# EAGLE board FET_ctrl[Conflict] (EAGLE 7.3.0)
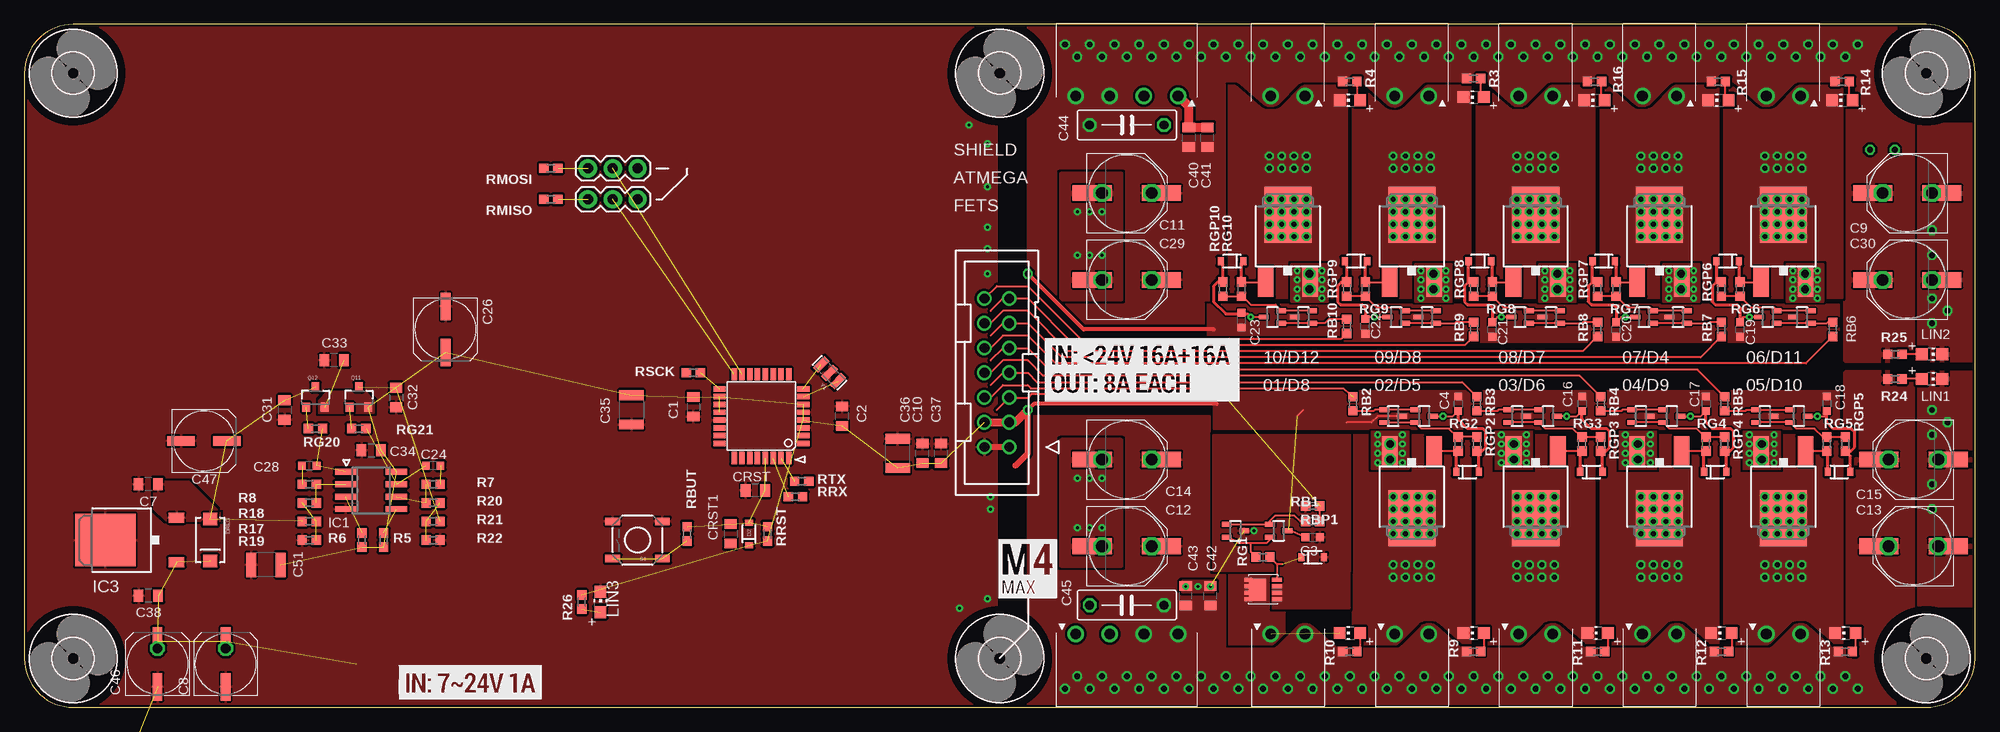
[diagram p0: board, top side]
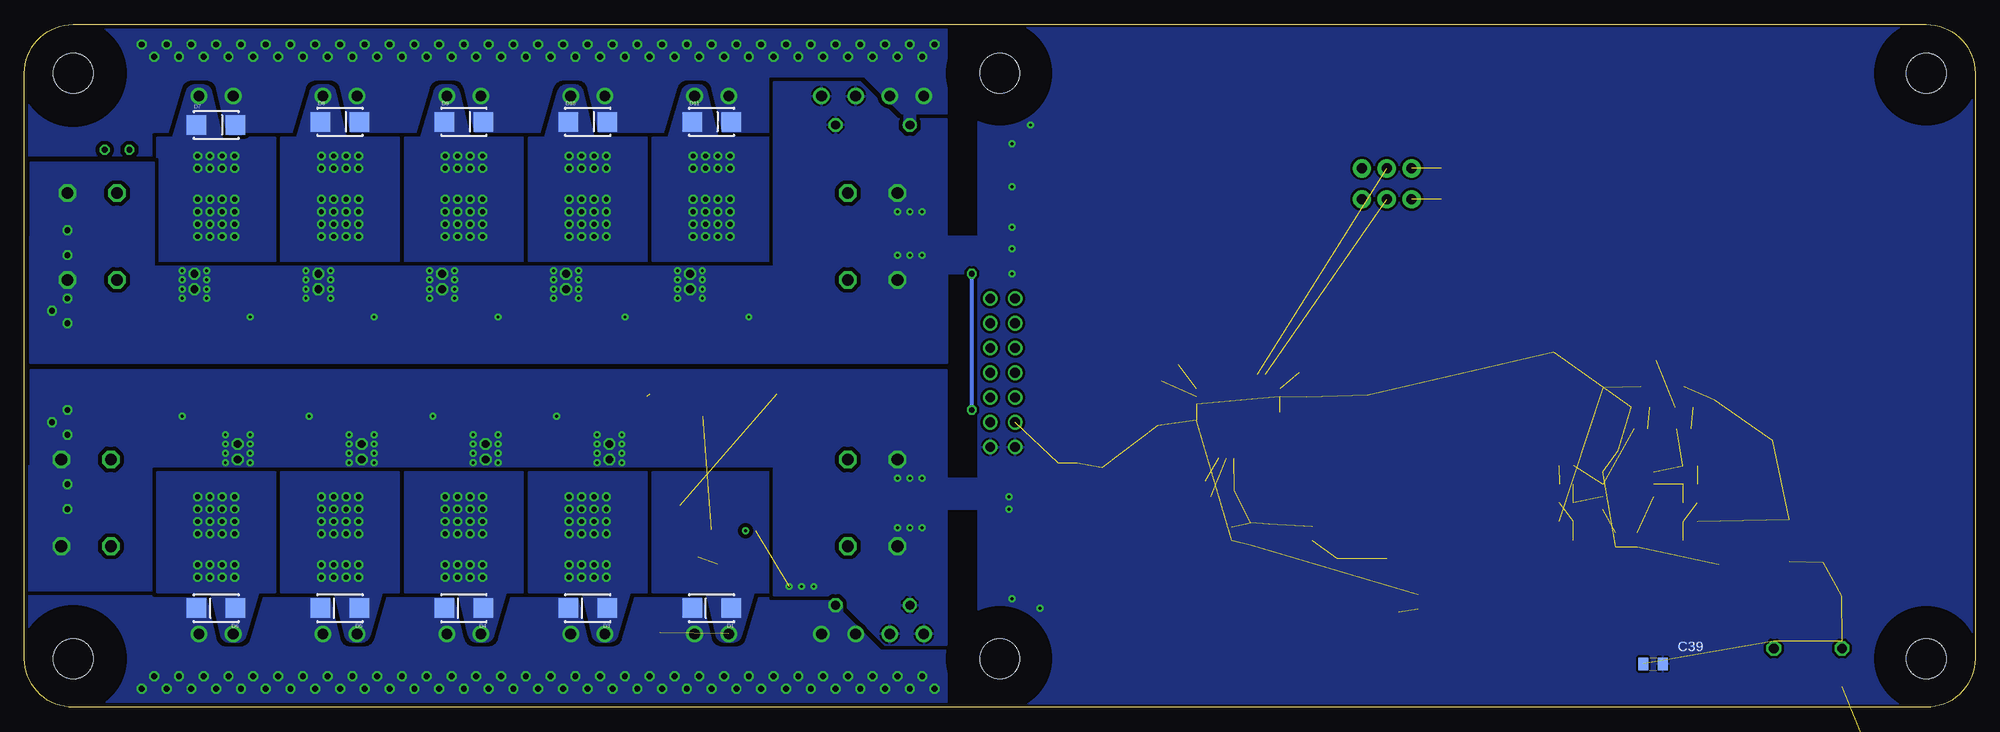
[diagram p1: board, bottom side, seen from below]

Size 200 x 70 mm. Coordinates in mm from the lower left corner, seen from the top.
Outline: 0,65 0,5 arc90 5,0 195,0 arc90 200,5 200,65 arc90 195,70 5,70 arc90 0,65
Copper layers (1*16): Top 0.035mm / dielectric 1.5mm / Bottom 0.035mm
Design rules "default": minimum track width 6mil, minimum drill 0.3mm, track to track 7mil, track to pad 7mil, pad to pad 7mil, via to via 7mil, smd to smd 6mil, copper to edge 10mil, drill to drill 10mil, minimum pad ring 10mil, minimum via ring 8mil, stop-mask expansion 3mil, vias tented up to drill 0.3mm, thermal gap 8mil

## Footprints (pad centres in the part's own frame; a part is rotated, then mirrored left to right if it is on the bottom)
C0805 = smd 1 x 1.25: 1 -1,0; 2 1,0
C0603 = smd 0.8 x 0.8: 1 -0.75,0; 2 0.75,0
UD-6,3X5,8_NICHICON = smd 2.8 x 1: + 2.35,0; - -2.35,0
PANASONIC_F = smd 4 x 1.6: + 3.55,0; - -3.55,0
C1210 = smd 1 x 2.5: 1 -1.5,0; 2 1.5,0
C075-032X103 = drill 0.914 octagon: 1 -3.81,0; 2 3.81,0
SMA-DIODE_ALT = smd 2 x 2: A -2,0; C 2,0
SOD-323 = smd 0.63 x 0.83: 1 -1.15,0; 2 1.15,0
SMA-DIODE = smd 1.27 x 1.47: A -2.15,0; C 2.15,0
4,1 = hole 4.1: 0,0
SO08 = smd 0.6 x 2.2: 1 -1.905,-2.6; 2 -0.635,-2.6; 3 0.635,-2.6; 4 1.905,-2.6; 5 1.905,2.6; 6 0.635,2.6; 7 -0.635,2.6; 8 -1.905,2.6
TO252 = smd 1 x 1.6: 1 -2.28,-4.8; 2 2.28,-4.8 | smd 5.4 x 6.2: 3 0,2.5
1X03 = drill 1.016 pad 1.88: 1 0,0; 2 2.54,0; 3 5.08,0
CHIP-LED0805 = smd 1.2 x 1.2: A 0,-1.05; C 0,1.05
POWERPAK1212-8 = smd 0.762 x 0.406: D1 1.549,0.991; D2 1.549,0.33; D3 1.549,-0.33; D4 1.549,-0.991 | smd 1.727 x 2.235: DPAD 0.584,0 | smd 0.991 x 0.406: G -1.422,-0.991; S1 -1.422,0.991; S2 -1.422,0.33; S3 -1.422,-0.33
DPAK = smd 1.6 x 3: 1 -2.28,-5.31; 3 2.28,-5.31 | smd 4.826 x 5.715: 4 0,1.588
SOT23-3 = smd 0.8 x 0.9: 1 -0.95,-1; 2 0.95,-1; 3 0,1.1
R0603 = smd 0.95 x 0.95: 1 -0.725,0; 2 0.725,0
TACTILE_SWITCH_SMD = smd 1.524 x 0.762: 1 -2.54,1.905; 2 2.54,1.905; 3 -2.54,-1.905; 4 2.54,-1.905
SOT323 = smd 0.5 x 1: 1 0,0.9; 2 -0.65,-0.9; 3 0.65,-0.9
TQFP32-08 = smd 1.27 x 0.559: 1 -4.293,2.8; 2 -4.293,2; 3 -4.293,1.2; 4 -4.293,0.4; 5 -4.293,-0.4; 6 -4.293,-1.2; 7 -4.293,-2; 8 -4.293,-2.8; 17 4.293,-2.8; 18 4.293,-2; 19 4.293,-1.2; 20 4.293,-0.4; 21 4.293,0.4; 22 4.293,1.2; 23 4.293,2; 24 4.293,2.8 | smd 0.559 x 1.27: 9 -2.8,-4.293; 10 -2,-4.293; 11 -1.2,-4.293; 12 -0.4,-4.293; 13 0.4,-4.293; 14 1.2,-4.293; 15 2,-4.293; 16 2.8,-4.293; 25 2.8,4.293; 26 2,4.293; 27 1.2,4.293; 28 0.4,4.293; 29 -0.4,4.293; 30 -1.2,4.293; 31 -2,4.293; 32 -2.8,4.293
TSSOP28 = smd 0.305 x 0.991: 1 -4.225,-2.918; 2 -3.575,-2.918; 3 -2.925,-2.918; 4 -2.275,-2.918; 5 -1.625,-2.918; 6 -0.975,-2.918; 7 -0.325,-2.918; 8 0.325,-2.918; 9 0.975,-2.918; 10 1.625,-2.918; 11 2.275,-2.918; 12 2.925,-2.918; 13 3.575,-2.918; 14 4.225,-2.918; 15 4.225,2.918; 16 3.575,2.918; 17 2.925,2.918; 18 2.275,2.918; 19 1.625,2.918; 20 0.975,2.918; 21 0.325,2.918; 22 -0.325,2.918; 23 -0.975,2.918; 24 -1.625,2.918; 25 -2.275,2.918; 26 -2.925,2.918; 27 -3.575,2.918; 28 -4.225,2.918
1751248 = drill 1.1 pad 1.7: 1 -1.75,-0.1; 2 1.75,-0.1
1751264 = drill 1.1 pad 1.7: 1 -5.25,-0.1; 2 -1.75,-0.1; 3 1.75,-0.1; 4 5.25,-0.1
PAK100/2500-14 = drill 1 pad 1.422: 1 -7.62,-1.27; 2 -7.62,1.27; 3 -5.08,-1.27; 4 -5.08,1.27; 5 -2.54,-1.27; 6 -2.54,1.27; 7 0,-1.27; 8 0,1.27; 9 2.54,-1.27; 10 2.54,1.27; 11 5.08,-1.27; 12 5.08,1.27; 13 7.62,-1.27; 14 7.62,1.27
RESONATOR-SMD = smd 0.7 x 1.7: 1 -1.2,0; 2 0,0; 3 1.2,0

## Placement (x,y rotation side)
C1  [C0805]  68.58,30.8 270 top
C2  [C0805]  83.82,29.84 90 top
C3  [C0603]  132.08,17.42 0 top
C4  [C0603]  147,31.11 270 top
C7  [C0805]  12.7,22.86 180 top
C8  [UD-6,3X5,8_NICHICON]  20.64,4.45 90 top
C9  [PANASONIC_F]  193.04,52.7 180 top
C10  [C0805]  92.08,26.04 90 top
C11  [PANASONIC_F]  113.03,52.7 0 top
C12  [PANASONIC_F]  113.03,16.51 0 top
C13  [PANASONIC_F]  193.68,16.51 180 top
C14  [PANASONIC_F]  113.03,25.4 0 top
C15  [PANASONIC_F]  193.68,25.4 180 top
C16  [C0603]  159.7,31.11 270 top
C17  [C0603]  172.4,31.11 270 top
C18  [C0603]  184.78,31.11 270 top
C19  [C0603]  175.9,38.73 90 top
C20  [C0603]  163.19,38.73 90 top
C21  [C0603]  150.5,38.73 90 top
C22  [C0603]  137.48,39.05 90 top
C23  [C0603]  124.78,39.69 90 top
C24  3.3nF  [C0603]  41.91,24.77 180 top
C26  [UD-6,3X5,8_NICHICON]  43.18,38.73 270 top
C28  3.3nF  [C0603]  29.21,24.77 0 top
C29  [PANASONIC_F]  113.03,43.81 0 top
C30  [PANASONIC_F]  193.04,43.81 180 top
C31  [C0805]  26.67,30.48 270 top
C32  [C0805]  38.1,31.75 270 top
C33  [C0805]  31.75,35.56 180 top
C34  [C0805]  35.56,26.35 0 top
C35  [C1210]  62.23,30.48 270 top
C36  [C1210]  89.53,26.04 90 top
C37  [C0805]  93.98,26.04 90 top
C38  [C0805]  12.7,11.43 180 top
C39  [C0805]  33.02,4.45 0 bottom
C40  [C0805]  119.38,58.42 90 top
C41  [C0805]  121.28,58.42 90 top
C42  [C0805]  121.6,11.43 90 top
C43  [C0805]  119.06,11.43 90 top
C44  [C075-032X103]  113.03,59.69 0 top
C45  [C075-032X103]  113.03,10.48 180 top
C46  [UD-6,3X5,8_NICHICON]  13.65,4.45 90 top
C47  [UD-6,3X5,8_NICHICON]  18.41,27.3 0 top
C51  [C1210]  24.77,14.61 180 top
CRST  [C0805]  74.93,22.23 180 top
CRST1  [C0805]  72.39,17.78 270 top
D1  [SMA-DIODE_ALT]  129.54,10.16 180 bottom
D2  [SOD-323]  74.3,17.78 90 top
D3  [SMA-DIODE_ALT]  142.24,10.16 180 bottom
D4  [SMA-DIODE_ALT]  154.94,10.16 180 bottom
D5  [SMA-DIODE_ALT]  167.64,10.16 180 bottom
D6  [SMA-DIODE_ALT]  180.34,10.16 180 bottom
D7  [SMA-DIODE_ALT]  180.34,59.69 0 bottom
D8  [SMA-DIODE_ALT]  167.64,60.01 0 bottom
D9  [SMA-DIODE_ALT]  154.94,60.01 0 bottom
D10  [SMA-DIODE_ALT]  142.24,60.01 0 bottom
D11  [SMA-DIODE_ALT]  129.54,60.01 0 bottom
DREG  [SMA-DIODE]  19.05,17.14 270 top
H1  MOUNT-HOLE4.1  [4,1]  100,5 0 top
H2  MOUNT-HOLE4.1  [4,1]  100,65 0 top
H9  MOUNT-HOLE4.1  [4,1]  195,5 0 top
H10  MOUNT-HOLE4.1  [4,1]  5,5 0 top
H11  MOUNT-HOLE4.1  [4,1]  5,65 0 top
H12  MOUNT-HOLE4.1  [4,1]  195,65 0 top
IC1  LM358D  [SO08]  35.56,22.23 270 top
IC3  7805  [TO252]  10.79,17.14 90 top
JPMISO  JUMPER-3PTH  [1X03]  57.78,52.07 0 top
JPMOSI  JUMPER-3PTH  [1X03]  57.78,55.24 0 top
LIN1  [CHIP-LED0805]  195.58,33.66 270 top
LIN2  [CHIP-LED0805]  195.58,36.2 270 top
LIN3  [CHIP-LED0805]  59.05,10.79 0 top
Q1  [POWERPAK1212-8]  127,12.06 180 top
Q2  IRLR2905  [DPAK]  142.24,20.95 180 top
Q3  IRLR2905  [DPAK]  154.94,20.95 180 top
Q4  IRLR2905  [DPAK]  167.64,20.95 180 top
Q5  IRLR2905  [DPAK]  180.34,20.95 180 top
Q6  IRLR2905  [DPAK]  180.34,48.9 0 top
Q7  IRLR2905  [DPAK]  167.64,48.9 0 top
Q8  IRLR2905  [DPAK]  154.94,48.9 0 top
Q9  IRLR2905  [DPAK]  142.24,48.9 0 top
Q10  IRLR2905  [DPAK]  129.54,48.9 0 top
Q11  P_FET  [SOT23-3]  34.29,31.75 0 top
Q12  P_FET  [SOT23-3]  29.84,31.75 0 top
R3  [R0603]  148.59,64.45 180 top
R4  [R0603]  135.89,64.14 180 top
R5  47k  [R0603]  36.83,17.14 270 top
R6  47k  [R0603]  34.61,17.14 270 top
R7  10k  [R0603]  41.91,22.86 0 top
R8  10K  [R0603]  29.21,22.86 180 top
R9  [R0603]  148.59,5.71 180 top
R10  [R0603]  135.89,5.71 180 top
R11  [R0603]  161.29,5.71 180 top
R12  [R0603]  173.99,5.71 180 top
R13  [R0603]  186.69,5.71 180 top
R14  [R0603]  186.37,64.14 180 top
R15  [R0603]  173.67,64.14 180 top
R16  [R0603]  160.97,64.14 180 top
R17  1k  [R0603]  29.21,19.05 180 top
R18  47k  [R0603]  29.21,20.95 180 top
R19  1M  [R0603]  29.21,17.14 180 top
R20  47k  [R0603]  41.91,20.95 180 top
R21  1k  [R0603]  41.91,19.05 0 top
R22  1M  [R0603]  41.91,17.14 180 top
R24  [R0603]  191.77,33.66 180 top
R25  [R0603]  191.77,36.2 180 top
R26  [R0603]  57.15,10.79 90 top
RB1  [R0603]  132.08,19.05 180 top
RB2  [R0603]  136.21,31.11 270 top
RB3  [R0603]  148.91,31.11 270 top
RB4  [R0603]  161.61,31.11 270 top
RB5  [R0603]  174.31,31.11 270 top
RB6  [R0603]  185.42,38.73 90 top
RB7  [R0603]  173.99,38.73 90 top
RB8  [R0603]  161.29,38.73 90 top
RB9  [R0603]  148.59,38.73 90 top
RB10  [R0603]  135.57,39.05 90 top
RBP1  [R0603]  132.08,20.64 180 top
RBUT  [R0603]  67.94,17.78 270 top
RG1  [R0603]  126.98,15.4 0 top
RG2  [R0603]  147,26.99 270 top
RG3  [R0603]  159.7,26.99 270 top
RG4  [R0603]  172.4,26.99 270 top
RG5  [R0603]  184.78,26.99 270 top
RG6  [R0603]  175.9,42.86 90 top
RG7  [R0603]  163.19,42.86 90 top
RG8  [R0603]  150.5,42.86 90 top
RG9  [R0603]  137.48,42.86 90 top
RG10  [R0603]  124.78,42.86 90 top
RG20  1k  [R0603]  29.84,28.57 180 top
RG21  1k  [R0603]  34.29,28.57 180 top
RGP2  [R0603]  148.91,26.99 270 top
RGP3  [R0603]  161.61,26.99 270 top
RGP4  [R0603]  174.31,26.99 270 top
RGP5  [R0603]  186.69,26.99 270 top
RGP6  [R0603]  173.99,42.86 90 top
RGP7  [R0603]  161.29,42.86 90 top
RGP8  [R0603]  148.59,42.86 90 top
RGP9  [R0603]  135.57,42.86 90 top
RGP10  [R0603]  122.87,42.86 90 top
RMISO  [R0603]  53.98,52.07 180 top
RMOSI  [R0603]  53.98,55.24 180 top
ROUTL  [CHIP-LED0805]  135.89,7.62 90 top
ROUTL1  [CHIP-LED0805]  148.59,7.62 90 top
ROUTL2  [CHIP-LED0805]  161.29,7.62 90 top
ROUTL3  [CHIP-LED0805]  173.99,7.62 90 top
ROUTL4  [CHIP-LED0805]  186.69,7.62 90 top
ROUTL5  [CHIP-LED0805]  186.37,62.23 90 top
ROUTL6  [CHIP-LED0805]  173.67,62.23 90 top
ROUTL7  [CHIP-LED0805]  160.97,62.23 90 top
ROUTL8  [CHIP-LED0805]  148.59,62.55 90 top
ROUTL9  [CHIP-LED0805]  135.89,62.23 90 top
RRST  [R0603]  76.2,17.78 90 top
RRX  [R0603]  79.06,21.59 0 top
RSCK  [R0603]  68.58,34.29 180 top
RTX  [R0603]  79.69,23.18 0 top
S1  [TACTILE_SWITCH_SMD]  62.87,17.14 180 top
T1  N  [SOT323]  128.59,18.1 270 top
T2  P  [SOT323]  124.16,18.1 270 top
T3  N  [SOT323]  140.34,29.84 270 top
T4  P  [SOT323]  143.51,29.84 270 top
T5  N  [SOT323]  153.03,29.84 270 top
T6  P  [SOT323]  156.21,29.84 270 top
T7  N  [SOT323]  165.74,29.84 270 top
T8  P  [SOT323]  168.91,29.84 270 top
T9  N  [SOT323]  178.44,29.84 270 top
T10  P  [SOT323]  181.93,29.84 270 top
T11  N  [SOT323]  182.25,40.01 90 top
T12  P  [SOT323]  178.75,40.01 90 top
T13  N  [SOT323]  169.54,40.01 90 top
T14  P  [SOT323]  166.05,40.01 90 top
T15  N  [SOT323]  156.53,40.01 90 top
T16  P  [SOT323]  153.35,40.01 90 top
T17  N  [SOT323]  143.83,40.01 90 top
T18  P  [SOT323]  140.65,40.01 90 top
T19  N  [SOT323]  131.13,40.01 90 top
T20  P  [SOT323]  127.95,40.01 90 top
U1  MEGA328  [TQFP32-08]  75.56,29.84 180 top
U2  [TSSOP28]  1.27,-15.24 0 top  (outside the outline)
U$2  Z5V  [SOD-323]  132.09,15.39 0 top
U$3  Z5V  [SOD-323]  147.96,24.13 0 top
U$4  Z5V  [SOD-323]  160.66,24.13 0 top
U$5  Z5V  [SOD-323]  173.35,24.13 0 top
U$6  Z5V  [SOD-323]  186.06,24.13 0 top
U$8  Z5V  [SOD-323]  161.93,45.72 180 top
U$9  Z5V  [SOD-323]  149.22,45.72 180 top
U$10  Z5V  [SOD-323]  136.53,45.72 180 top
U$11  Z5V  [SOD-323]  123.83,45.72 180 top
X1  [1751248]  129.54,7.62 0 top
X3  1751264  [1751264]  113.03,62.55 180 top
X7  1751248  [1751248]  142.24,7.62 0 top
X8  1751248  [1751248]  154.94,7.62 0 top
X9  1751248  [1751248]  167.64,7.62 0 top
X10  1751248  [1751248]  180.34,7.62 0 top
X11  1751248  [1751248]  180.34,62.55 180 top
X12  1751248  [1751248]  167.64,62.55 180 top
X13  1751248  [1751248]  154.94,62.55 180 top
X14  2514-  [PAK100/2500-14]  99.69,34.29 90 top
X15  1751264  [1751264]  113.03,7.62 0 top
X16  1751248  [1751248]  142.24,62.55 180 top
X17  1751248  [1751248]  129.54,62.55 180 top
Y1  16MHz  [RESONATOR-SMD]  82.55,34.29 135 top
ZENER  Z5V  [SOD-323]  174.62,45.72 180 top

## Library data of the parts
C1-C4 C7 C10 C16-C24 C28 C31-C45 C51 CRST CRST1 R3-R22 R24-R26 RB1-RB10 RBP1 RBUT RG1-RG10 RG20 RG21 RGP2-RGP10 RMISO RMOSI RRST RRX RSCK RTX = wes
C8 C9 C11-C15 C26 C29 C30 C46 C47 = rcl
D1 D3-D11 DREG Q11 Q12 U$2-U$6 U$8-U$11 ZENER = SparkFun-DiscreteSemi
D2 = SparkFun-DiscreteSemi; PROD_ID: DIO-09646
H1 H2 H9-H12 = holes
IC1 = linear
IC3 LIN1-LIN3 ROUTL ROUTL1-ROUTL9 U2 = adafruit
JPMISO JPMOSI = SparkFun-Passives
Q1 = SparkFun-DiscreteSemi; PROD_ID: TRANS-11055
Q2-Q10 = SparkFun-DiscreteSemi; PROD_ID: TRANS-09984
S1 = SparkFun-Electromechanical; PROD_ID: SWCH-08247
T1 T3 T5 T7 T9 T11 T13 T15 T17 T19 = zetex; MPN: DSS4160U-7; OC_FARNELL: 1710696; OC_NEWARK: 25R4558
T2 T4 T6 T8 T10 T12 T14 T16 T18 T20 = zetex; MPN: 2DB1689-7; OC_FARNELL: 1710698; OC_NEWARK: 25R5667
U1 = SparkFun-DigitalIC; PROD_ID: IC-09069
X1 X7-X13 X16 X17 = wes; OC_FARNELL: unknown; OC_NEWARK: unknown
X3 X15 = wes; MPN: 1751264; OC_FARNELL: unknown; OC_NEWARK: 10R0934
X14 = con-3m; OC_FARNELL: unknown; OC_NEWARK: unknown
Y1 = SparkFun-FreqCtrl; PROD_ID: XTAL-08900

## Nets
+5V: C1.1 C2.1 C3.1 C4.1 C10.1 C16.1 C17.1 C18.1 C19.1 C20.1 C21.1 C22.1 C23.1 C26.+ C33.1 C34.2 C35.1 C36.1 C37.1 C51.1 D2.1 IC1.8 Q11.2 Q12.2 R5.2 R6.2 R26.2 RRST.1 T1.1 T3.1 T5.1 T7.1 T9.1 T11.1 T13.1 T15.1 T17.1 T19.1 U1.4 U1.6 U1.18 U1.20 X14.3 X14.4
A0: U1.23
A1: U1.24
A2: U1.25
A3: U1.26
A4: U1.27
A5: U1.28
A6: U1.19
A7: U1.22
ARDVIN: C8.+ C38.1 C39.1 C46.+ DREG.C IC3.1
BASE1: RB1.1 RBP1.1 X14.5
BASE2: RB2.1 X14.6
BASE3: RB3.1 X14.7
BASE4: RB4.1 X14.8
BASE5: RB5.1 X14.9
BASE6: RB6.1 X14.10
BASE7: RB7.1 X14.11
BASE8: RB8.1 X14.12
BASE9: RB9.1 X14.13
BASE10: RB10.1 X14.14
D2: U1.32
D3: U1.1
D4: U1.2
D5: U1.9
D6: U1.10
D7: U1.11
D8: U1.12
D9: U1.13
D10: U1.14
D11: JPMOSI.3
D12: JPMISO.3
DTR: CRST1.2
GND: C1.2 C2.2 C3.2 C4.2 C7.2 C8.- C9.- C10.2 C11.- C12.- C13.- C14.- C15.- C16.2 C17.2 C18.2 C19.2 C20.2 C21.2 C22.2 C23.2 C26.- C29.- C30.- C31.2 C32.2 C33.2 C34.1 C35.2 C36.2 C37.2 C38.2 C39.2 C40.2 C41.2 C42.2 C43.2 C44.2 C45.2 C46.- C47.- C51.2 CRST.2 IC1.4 IC3.3 LIN1.C LIN2.C LIN3.C Q1.S1 Q1.S2 Q1.S3 Q2.3 Q3.3 Q4.3 Q5.3 Q6.3 Q7.3 Q8.3 Q9.3 Q10.3 R19.2 R22.1 RBP1.2 RGP2.2 RGP3.2 RGP4.2 RGP5.2 RGP6.2 RGP7.2 RGP8.2 RGP9.2 RGP10.2 S1.3 S1.4 T2.1 T4.1 T6.1 T8.1 T10.1 T12.1 T14.1 T16.1 T18.1 T20.1 U1.3 U1.5 U1.21 U2.14 U$2.2 U$3.2 U$4.2 U$5.2 U$6.2 U$8.2 U$9.2 U$10.2 U$11.2 X3.1 X3.2 X14.1 X14.2 X15.1 X15.2 Y1.2 ZENER.2
MISO: RMISO.2
MOSI: RMOSI.2
N$5: JPMOSI.1 RMOSI.1
N$6: JPMISO.2 U1.16
N$7: JPMISO.1 RMISO.1
N$8: RSCK.1 U1.17
N$9: RRX.1 U1.30
N$10: RTX.1 U1.31
N$14: IC1.5 R5.1
N$15: LIN1.A R24.1
N$20: JPMOSI.2 U1.15
N$21: C24.2 IC1.7 RG21.1
N$23: U1.8 Y1.3
N$24: U1.7 Y1.1
N$25: IC1.3 R6.1
N$28: IC1.6 R7.1 R20.2
N$30: IC1.2 R8.1 R18.1
N$31: C28.1 R8.2
N$32: C24.1 R7.2
N$33: R17.1 R18.2 R19.1
N$36: LIN2.A R25.1
N$44: LIN3.A R26.1
N$46: R20.1 R21.1 R22.2
N$53: D3.A Q2.4 ROUTL1.C X7.1
N$54: Q2.1 RG2.2 U$3.1
N$57: R9.1 ROUTL1.A
N$58: D4.A Q3.4 ROUTL2.C X8.1
N$60: RBUT.2 S1.1 S1.2
N$61: Q3.1 RG3.2 U$4.1
N$62: R11.1 ROUTL2.A
N$64: Q11.1 RG21.2
N$65: Q1.G RG1.2 U$2.1
N$66: Q4.1 RG4.2 U$5.1
N$67: Q12.1 RG20.2
N$69: R12.1 ROUTL3.A
N$70: D6.A Q5.4 ROUTL4.C X10.1
N$73: Q5.1 RG5.2 U$6.1
N$74: R13.1 ROUTL4.A
N$83: C28.2 IC1.1 RG20.1
N$90: D1.A Q1.D1 Q1.D2 Q1.D3 Q1.D4 Q1.DPAD ROUTL.C X1.1
N$95: R10.1 ROUTL.A
N$96: RB1.2 T1.2 T2.2
N$97: RB2.2 T3.2 T4.2
N$98: D10.A Q9.4 ROUTL8.C X16.1
N$100: Q9.1 RG9.2 U$10.1
N$101: R3.1 ROUTL8.A
N$102: D11.A Q10.4 ROUTL9.C X17.1
N$103: Q10.1 RG10.2 U$11.1
N$104: R4.1 ROUTL9.A
N$105: RG1.1 T1.3 T2.3
N$108: RB3.2 T5.2 T6.2
N$114: RB4.2 T7.2 T8.2
N$117: RB5.2 T9.2 T10.2
N$120: RB6.2 T11.2 T12.2
N$123: RB7.2 T13.2 T14.2
N$126: RB8.2 T15.2 T16.2
N$127: D7.A Q6.4 ROUTL5.C X11.1
N$130: RB9.2 T17.2 T18.2
N$133: RB10.2 T19.2 T20.2
N$141: Q6.1 RG6.2 ZENER.1
N$142: R14.1 ROUTL5.A
N$143: D8.A Q7.4 ROUTL6.C X12.1
N$144: Q7.1 RG7.2 U$8.1
N$145: R15.1 ROUTL6.A
N$146: D9.A Q8.4 ROUTL7.C X13.1
N$147: Q8.1 RG8.2 U$9.1
N$148: R16.1 ROUTL7.A
POWERBUS_A: C9.+ C11.+ C29.+ C30.+ C40.1 C41.1 C44.1 D7.C D8.C D9.C D10.C D11.C R3.2 R4.2 R14.2 R15.2 R16.2 R25.2 X3.3 X3.4 X11.2 X12.2 X13.2 X16.2 X17.2
POWERBUS_B: C12.+ C13.+ C14.+ C15.+ C42.1 C43.1 C45.1 D1.C D3.C D4.C D5.C D6.C R9.2 R10.2 R11.2 R12.2 R13.2 R24.2 X1.2 X7.2 X8.2 X9.2 X10.2 X15.3 X15.4
Q4: D5.A Q4.4 ROUTL3.C X9.1
REGOUT: C7.1 C31.1 C47.+ DREG.A IC3.2 Q12.3 R17.2
RG1: RG9.1 RGP9.1 T17.3 T18.3
RG2: RG2.1 RGP2.1 T3.3 T4.3
RG3: RG3.1 RGP3.1 T5.3 T6.3
RG4: RG4.1 RGP4.1 T7.3 T8.3
RG5: RG5.1 RGP5.1 T9.3 T10.3
RG6: RG6.1 RGP6.1 T11.3 T12.3
RG7: RG7.1 RGP7.1 T13.3 T14.3
RG8: RG8.1 RGP8.1 T15.3 T16.3
RG9: RG10.1 RGP10.1 T19.3 T20.3
RST: CRST1.1 CRST.1 D2.2 RBUT.1 RRST.2 U1.29
RXD: RRX.2
SCK: RSCK.2
TXD: RTX.2
USBIN: C32.1 Q11.3 R21.2
VDD: U2.28

## Tracks (layer width: path | path; a pad name or v marks a point on that pad's centre or on a via)
+5V  (via drill 0.6)  (22 unrouted)
  Top 0.203: T3.1 138.75,29.84 138.11,29.21 135.57,29.21 | 131.13,30.48 130.49,29.84 | C3.1 129.58,18.19 T1.1
  Top 0.406: 122.24,31.11 103.5,31.11 v102.87,30.48 | 121.92,38.73 108.58,38.73 v102.87,44.45 | X14.3 101.6,29.21
  Top 0.61: 101.6,24.77 102.87,26.04 v102.87,30.48
  Top 0.813: X14.4 X14.3 | 101.6,29.21 v102.87,30.48
  Bottom 0.406: v102.87,44.45 v102.87,30.48
  pour Top (rank 2, no thermals): 121.92,32.38 121.92,28.57 186.06,28.57 186.06,32.38
  pour Top (rank 2, no thermals): 121.28,41.27 121.28,37.47 186.06,37.47 186.06,41.27
  pour Top (isolate 0.254, no thermals): 35.88,30.16 35.88,31.43 34.92,32.38 31.11,32.38 30.16,31.43 30.16,30.16
ARDVIN  (5 unrouted)
BASE1  (1 unrouted)
  Top 0.203: 122.87,32.07 103.19,32.07 102.87,31.75 X14.5 99.69,30.48 | RB1.1 RBP1.1
BASE2  (1 unrouted)
  Top 0.203: X14.6 99.06,31.75 100.33,33.02 102.87,33.02 103.19,32.7 135.25,32.7 135.89,32.07
BASE3
  Top 0.203: RB3.1 147.41,33.34 103.82,33.34 102.87,34.29 X14.7 100.33,34.29 99.06,33.02
BASE4
  Top 0.203: RB4.1 159.47,33.97 104.46,33.97 102.87,35.56 100.33,35.56 99.06,34.29 X14.8
BASE5
  Top 0.203: RB5.1 171.54,34.61 105.09,34.61 102.87,36.83 X14.9 100.33,36.83 99.06,35.56
BASE6
  Top 0.203: RB6.1 182.65,35.24 105.73,35.24 102.87,38.1 100.33,38.1 99.06,36.83 X14.10
BASE7
  Top 0.203: RB7.1 171.86,35.88 106.36,35.88 102.87,39.37 X14.11 100.33,39.37 99.06,38.1
BASE8
  Top 0.203: RB8.1 159.79,36.51 107,36.51 102.87,40.64 100.33,40.64 99.06,39.37 X14.12
BASE9
  Top 0.203: RB9.1 147.73,37.15 126.36,37.15 123.19,37.15 107.63,37.15 102.87,41.91 X14.13 100.33,41.91 99.06,40.64
BASE10
  Top 0.203: X14.14 99.69,43.18 102.87,43.18 108.27,37.78 123.51,37.78 126.05,37.78 135.03,37.78 RB10.1
GND  (via drill 0.3, 0.3 pad 0.5, 0.6, 0.8, 1.2)  (2 unrouted)
  Top 0.203: T4.1 v145.41,29.84 146.48,29.84 C4.2 147,30.48 | T8.1 v170.81,29.84 171.88,29.84 C17.2 | C16.2 159.18,29.84 v158.12,29.84 T6.1 | T10.1 v183.83,29.84 184.58,29.84 C18.2 | T12.1 v176.85,40.01 176.21,40.01 175.9,39.69 C19.2 | RGP6.2 173.44,43.59 | T14.1 v164.15,40.01 163.72,40.01 C20.2 | RGP7.2 160.75,43.59 | T16.1 v151.45,40.01 151.01,40.01 C21.2 | RGP8.2 148.04,43.59 | T18.1 v138.43,40.01 137.68,40.01 C22.2 | T20.1 v125.73,40.01
  Top 0.305: C4.2 147,29.53 147.96,28.57 149.54,28.57 149.86,28.26 149.86,26.67 149.45,26.26 RGP2.2 149.1,26.07 U$3.2 | C16.2 159.7,29.53 160.66,28.57 162.24,28.57 162.56,28.26 162.56,26.67 162.15,26.26 RGP3.2 161.81,26.07 U$4.2 | C17.2 172.4,29.21 173.04,28.57 174.94,28.57 175.26,28.26 175.26,26.67 174.85,26.26 RGP4.2 174.5,26.07 U$5.2 | C18.2 184.78,29.21 185.42,28.57 187.32,28.57 187.64,28.26 187.64,26.67 187.24,26.26 RGP5.2 187.21,25.75 U$6.2 | C19.2 175.9,40.96 175.58,41.27 173.35,41.27 173.04,41.59 173.04,43.18 173.44,43.59 173.47,43.62 ZENER.2 | C20.2 163.19,40.96 162.88,41.27 160.66,41.27 160.34,41.59 160.34,43.18 160.75,43.59 160.75,45.69 U$8.2 | C21.2 150.5,40.96 150.18,41.27 147.96,41.27 147.64,41.59 147.64,43.18 148.04,43.59 148.04,45.69 U$9.2 | C22.2 137.48,40.96 137.16,41.27 134.94,41.27 134.62,41.59 134.62,43.18 135.03,43.59 RGP9.2 135.57,45.52 U$10.2 | U$11.2 122.87,45.52 RGP10.2 122.33,43.59 121.92,43.18 121.92,41.59 123.19,40.32 124.46,40.32 | 124.46,40.32 125.41,40.32 v125.73,40.01 | C23.2 124.58,40.44 124.46,40.32
  Top 0.61: X14.1 X14.2
  Top 0.914: C41.2 C40.2 119.38,61.55 X3.1
  other vias: 176.85,25.08 176.85,26.99 176.85,27.94 179.39,26.99 179.39,25.08 176.85,26.04 179.39,27.94 178.12,26.99 178.12,25.4 107.95,50.8 109.22,50.8 110.49,50.8 110.49,46.35 109.22,46.35 107.95,46.35 107.95,23.5 109.22,23.5 110.49,23.5 107.95,18.41 109.22,18.41 110.49,18.41 197.17,40.64 195.58,39.37 195.58,41.91 197.17,29.21 195.58,30.48 195.58,27.94 195.58,22.86 179.39,26.04 164.15,25.08 164.15,26.99 164.15,27.94 166.69,26.99 166.69,25.08 164.15,26.04 166.69,27.94 165.42,26.99 165.42,25.4 166.69,26.04 151.45,25.08 151.45,26.99 151.45,27.94 153.99,26.99 153.99,25.08 151.45,26.04 153.99,27.94 152.72,26.99 152.72,25.4 153.99,26.04 138.75,25.08 138.75,26.99 138.75,27.94 141.29,26.99 141.29,25.08 138.75,26.04 141.29,27.94 140.02,26.99 140.02,25.4 141.29,26.04 158.43,44.77 158.43,42.86 158.43,41.91 155.89,42.86 155.89,44.77 158.43,43.81 155.89,41.91 157.16,42.86 157.16,44.45 155.89,43.81 171.13,44.77 171.13,42.86 171.13,41.91 168.59,42.86 168.59,44.77 171.13,43.81 168.59,41.91 169.86,42.86 169.86,44.45 168.59,43.81 183.83,44.77 183.83,42.86 183.83,41.91 181.29,42.86 181.29,44.77 183.83,43.81 181.29,41.91 182.56,42.86 182.56,44.45 181.29,43.81 145.73,44.77 145.73,42.86 145.73,41.91 143.19,42.86 143.19,44.77 145.73,43.81 143.19,41.91 144.46,42.86 144.46,44.45 143.19,43.81 133.03,44.77 133.03,42.86 133.03,41.91 130.49,42.86 130.49,44.77 133.03,43.81 130.49,41.91 131.76,42.86 131.76,44.45 130.49,43.81 110.49,52.7 121.6,12.38 120.33,12.38 119.06,12.38 110.49,43.81 110.49,25.4 110.49,16.51 195.58,52.7 195.58,43.81 196.22,25.4 196.22,16.51 195.58,20.32 195.58,46.35 195.58,48.9 96.84,59.69 98.74,57.78 98.74,53.34 98.74,49.21 98.74,44.45 99.06,21.59 99.06,20.32 98.74,46.99 98.74,11.11 95.89,10.16 126.05,18.1
  pour Top (no thermals): 176.21,28.26 176.21,24.45 180.02,24.45 180.02,28.26
  pour Bottom (isolate 0.406, rank 3): 105.41,48.26 105.41,35.24 199.39,35.24 199.39,48.26
  pour Bottom (isolate 0.406): 120.65,64.14 114.3,64.14 110.49,60.33 105.41,60.33 105.41,36.83 123.19,36.83 123.19,64.14
  pour Top (isolate 0.254): 112.39,27.3 106.36,27.3 106.36,14.61 112.39,14.61
  pour Bottom (isolate 0.406): 123.19,11.43 116.84,11.43 111.76,6.35 105.41,6.35 105.41,33.02 123.19,33.02
  pour Top (isolate 0.254): 194.31,59.69 201.93,59.69 201.93,35.56 194.31,35.56
  pour Bottom (isolate 0.406): 186.69,55.88 199.39,55.88 199.39,45.09 186.69,45.09
  pour Top (isolate 0.254): 194.31,34.29 201.93,34.29 201.93,10.48 194.31,10.48
  pour Bottom (isolate 0.406, rank 4): 185.42,24.77 200.66,24.77 200.66,11.43 185.42,11.43
  pour Bottom (isolate 0.406, rank 3): 105.41,34.61 105.41,22.23 199.39,22.23 199.39,34.61
  pour Top (isolate 0.254): 112.39,54.61 106.36,54.61 106.36,41.91 112.39,41.91
  pour Bottom (isolate 0.254): 98.42,23.5 98.42,20.32 106.05,20.32 106.05,23.5
  pour Bottom (isolate 0.254): 97.79,48.26 97.79,44.45 107.95,44.45 107.95,48.26
  pour Top (isolate 0.254, rank 3): 0,-5.71 99.69,-5.71 99.69,81.92 0,81.92
  pour Top (no thermals): 163.51,28.26 163.51,24.45 167.32,24.45 167.32,28.26
  pour Top (no thermals): 150.81,28.26 150.81,24.45 154.62,24.45 154.62,28.26
  pour Top (no thermals): 138.11,28.26 138.11,24.45 141.92,24.45 141.92,28.26
  pour Top (no thermals): 159.07,41.59 159.07,45.4 155.26,45.4 155.26,41.59
  pour Top (no thermals): 167.96,45.4 167.96,41.59 171.77,41.59 171.77,45.4
  pour Top (no thermals): 184.47,41.59 184.47,45.4 180.66,45.4 180.66,41.59
  pour Top (no thermals): 146.37,41.59 146.37,45.4 142.56,45.4 142.56,41.59
  pour Top (no thermals): 133.67,41.59 133.67,45.4 129.86,45.4 129.86,41.59
  pour Top (isolate 0.406, no thermals): 118.75,13.02 121.92,13.02 121.92,11.75 118.75,11.75
  pour Bottom (isolate 0.254, rank 2): -4.45,76.83 102.23,76.83 102.23,-11.43 -4.45,-11.43
  pour Top: 121.92,27.94 135.89,27.94 135.89,13.97 121.92,13.97
  pour Top (no thermals): 127.95,13.97 127.95,10.16 135.89,10.16 135.89,13.97
N$5  (1 unrouted)
N$6  (1 unrouted)
N$7  (1 unrouted)
N$8  (1 unrouted)
N$9  (1 unrouted)
N$10  (1 unrouted)
N$14  (1 unrouted)
N$15
  Top 0.203: LIN1.A R24.1
N$20  (1 unrouted)
N$21  (2 unrouted)
N$23  (1 unrouted)
N$24  (1 unrouted)
N$25  (1 unrouted)
N$28  (2 unrouted)
N$30  (2 unrouted)
N$31  (1 unrouted)
N$32  (1 unrouted)
N$33  (2 unrouted)
N$36
  Top 0.203: LIN2.A R25.1
N$40  (via drill 1 pad 0.5)
  other vias: 20.64,6.03
N$43  (via drill 1 pad 0.5)
  other vias: 13.65,6.03
N$44  (1 unrouted)
N$46  (2 unrouted)
N$53  (via drill 0.5)
  other vias: 140.34,14.61 141.6,14.61 142.88,14.61 144.15,14.61 144.15,13.34 142.88,13.34 141.6,13.34 140.34,13.34 140.34,21.59 141.6,21.59 142.88,21.59 144.15,21.59 144.15,20.32 142.88,20.32 141.6,20.32 140.34,20.32 140.34,19.05 141.6,19.05 142.88,19.05 144.15,19.05 144.15,17.78 142.88,17.78 141.6,17.78 140.34,17.78
  pour Top (isolate 0.254, rank 2, no thermals): 136.21,27.94 148.27,27.94 148.27,6.35 136.21,6.35
  pour Bottom (isolate 0.406, rank 2): 136.21,24.13 136.21,11.75 148.27,11.75 148.27,24.13
  pour Bottom (isolate 0.406, no thermals): 137.79,12.06 139.17,7.39 arc74 140.13,6.67 140.81,6.67 arc77 141.79,7.44 142.88,12.06
N$54
  Top 0.203: RG2.2 Q2.1
  Top 0.305: U$3.1 146.81,26.07 RG2.2
N$57
  Top 0.203: ROUTL1.A 149.64,6.04 R9.1
N$58  (via drill 0.5)
  other vias: 153.03,14.61 154.31,14.61 155.57,14.61 156.84,14.61 156.84,13.34 155.57,13.34 154.31,13.34 153.03,13.34 153.03,21.59 154.31,21.59 155.57,21.59 156.84,21.59 156.84,20.32 155.57,20.32 154.31,20.32 153.03,20.32 153.03,19.05 154.31,19.05 155.57,19.05 156.84,19.05 156.84,17.78 155.57,17.78 154.31,17.78 153.03,17.78
  pour Top (isolate 0.254, rank 2, no thermals): 148.91,27.94 160.97,27.94 160.97,6.35 148.91,6.35
  pour Bottom (isolate 0.406, rank 2): 148.91,24.13 148.91,11.75 160.97,11.75 160.97,24.13
  pour Bottom (isolate 0.406, no thermals): 150.5,12.06 151.87,7.39 arc74 152.83,6.67 153.51,6.67 arc77 154.49,7.44 155.57,12.06
N$60  (2 unrouted)
N$61
  Top 0.203: RG3.2 Q3.1
  Top 0.305: U$4.1 159.5,26.07 RG3.2
N$62
  Top 0.203: ROUTL2.A 162.34,6.04 R11.1
N$64  (1 unrouted)
N$65  (1 unrouted)
  Top 0.203: RG1.2 128.42,14.69 | 128.42,14.69 Q1.G | 128.95,14.69 128.42,14.69
N$66
  Top 0.203: RG4.2 Q4.1
  Top 0.305: U$5.1 172.21,26.07 RG4.2
N$67  (1 unrouted)
N$69
  Top 0.203: ROUTL3.A 175.04,6.04 R12.1
N$70  (via drill 0.5)
  other vias: 178.44,14.61 179.71,14.61 180.97,14.61 182.25,14.61 182.25,13.34 180.97,13.34 179.71,13.34 178.44,13.34 178.44,21.59 179.71,21.59 180.97,21.59 182.25,21.59 182.25,20.32 180.97,20.32 179.71,20.32 178.44,20.32 178.44,19.05 179.71,19.05 180.97,19.05 182.25,19.05 182.25,17.78 180.97,17.78 179.71,17.78 178.44,17.78
  pour Top (isolate 0.254, rank 2, no thermals): 174.31,27.94 186.37,27.94 186.37,6.35 174.31,6.35
  pour Bottom (isolate 0.406, rank 2): 174.31,24.13 174.31,11.75 186.37,11.75 186.37,24.13
  pour Bottom (isolate 0.406, no thermals): 175.9,12.06 177.27,7.39 arc74 178.23,6.67 178.91,6.67 arc77 179.89,7.44 180.97,12.06
N$73
  Top 0.203: RG5.2 Q5.1
  Top 0.305: U$6.1 184.91,26.14 RG5.2
N$74
  Top 0.203: R13.1 187.74,6.04 ROUTL4.A
N$83  (2 unrouted)
N$86  (via drill 0.6)
  other vias: 189.23,57.15
N$88  (via drill 0.6)
  other vias: 191.77,57.15
N$90  (1 unrouted)
  pour Top (isolate 0.254, rank 2, no thermals): 123.51,13.97 129.22,13.97 129.22,6.35 123.51,6.35
  pour Bottom (isolate 0.406, rank 2): 123.51,24.13 123.51,11.75 135.57,11.75 135.57,24.13
  pour Bottom (isolate 0.406, no thermals): 125.09,12.06 126.47,7.39 arc74 127.43,6.67 128.11,6.67 arc77 129.09,7.44 130.18,12.06
N$95
  Top 0.203: ROUTL.A 136.94,6.04 R10.1
N$96
  Top 0.203: RB1.2 130.81,19.05 130.18,19.68 128.27,19.68 127.69,19.1 T1.2 T2.2
N$97
  Top 0.203: T4.2 T3.2 138.44,30.5 138.34,30.39 RB2.2
N$98  (via drill 0.5)
  other vias: 144.15,56.52 142.88,56.52 141.6,56.52 140.34,56.52 140.34,55.24 141.6,55.24 142.88,55.24 144.15,55.24 144.15,48.26 142.88,48.26 141.6,48.26 140.34,48.26 140.34,49.53 141.6,49.53 142.88,49.53 144.15,49.53 144.15,50.8 142.88,50.8 141.6,50.8 140.34,50.8 140.34,52.07 141.6,52.07 142.88,52.07 144.15,52.07
  pour Top (isolate 0.254, rank 2, no thermals): 136.21,64.14 148.27,64.14 148.27,41.91 136.21,41.91
  pour Bottom (isolate 0.406, rank 2): 136.21,58.42 136.21,45.72 148.27,45.72 148.27,58.42
  pour Bottom (isolate 0.406, no thermals): 146.69,58.42 145.31,63.1 arc74 144.35,63.82 143.67,63.82 arc77 142.69,63.05 141.6,58.42
N$100
  Top 0.203: RG9.2 Q9.1
  Top 0.305: RG9.2 137.48,45.52 U$10.1
N$101
  Top 0.203: ROUTL8.A 149.31,62.87 R3.1
N$102  (via drill 0.5)
  other vias: 131.44,56.52 130.18,56.52 128.91,56.52 127.64,55.24 127.64,56.52 128.91,55.24 130.18,55.24 131.44,55.24 131.44,48.26 130.18,48.26 128.91,48.26 127.64,48.26 127.64,49.53 128.91,49.53 130.18,49.53 131.44,49.53 131.44,50.8 130.18,50.8 128.91,50.8 127.64,50.8 127.64,52.07 128.91,52.07 130.18,52.07 131.44,52.07
  pour Top (isolate 0.254, rank 2, no thermals): 123.51,64.14 135.57,64.14 135.57,41.91 123.51,41.91
  pour Bottom (isolate 0.406, no thermals): 133.99,58.42 132.61,63.1 arc74 131.65,63.82 130.97,63.82 arc77 129.99,63.05 128.91,58.42
  pour Bottom (isolate 0.406, rank 2): 123.51,58.42 123.51,45.72 135.57,45.72 135.57,58.42
N$103
  Top 0.203: RG10.2 Q10.1
  Top 0.305: RG10.2 124.78,45.52 U$11.1
N$104
  Top 0.203: R4.1 136.62,62.55 ROUTL9.A
N$105
  Top 0.203: T2.3 124.21,17.08 124.46,16.83 125.73,16.83 | T1.3 127.69,17.2 127.32,16.83 125.73,16.83 | RG1.1 125.73,15.93 125.73,16.83
N$108
  Top 0.203: T6.2 T5.2 151.15,30.5 151.04,30.39 RB3.2
N$114
  Top 0.203: T8.2 T7.2 163.84,30.5 163.74,30.39 RB4.2
N$117
  Top 0.203: T10.2 T9.2 176.54,30.5 176.44,30.39 RB5.2
N$120
  Top 0.203: T12.2 T11.2 184.77,39.35 184.88,39.46 RB6.2
N$123
  Top 0.203: T14.2 T13.2 172.71,39.35 172.81,39.46 RB7.2
N$126
  Top 0.203: T16.2 T15.2 159.69,39.35 159.79,39.46 RB8.2
N$127  (via drill 0.5)
  other vias: 182.25,56.52 180.97,56.52 179.71,56.52 178.44,56.52 178.44,55.24 179.71,55.24 180.97,55.24 182.25,55.24 182.25,48.26 180.97,48.26 179.71,48.26 178.44,48.26 178.44,49.53 179.71,49.53 180.97,49.53 182.25,49.53 182.25,50.8 180.97,50.8 179.71,50.8 178.44,50.8 178.44,52.07 179.71,52.07 180.97,52.07 182.25,52.07
  pour Top (isolate 0.254, rank 2, no thermals): 174.31,64.14 186.37,64.14 186.37,41.91 174.31,41.91
  pour Bottom (isolate 0.406, rank 2): 174.31,58.42 174.31,45.72 186.37,45.72 186.37,58.42
  pour Bottom (isolate 0.406, no thermals): 184.78,58.42 183.41,63.1 arc74 182.45,63.82 181.77,63.82 arc77 180.79,63.05 179.71,58.42
N$130
  Top 0.203: T18.2 T17.2 146.67,39.35 146.78,39.46 RB9.2
N$133
  Top 0.203: T20.2 T19.2 132.04,39.37 133.35,39.37 133.76,39.78 RB10.2
N$141
  Top 0.203: RG6.2 Q6.1
  Top 0.305: ZENER.1 175.78,43.71 RG6.2
N$142
  Top 0.203: ROUTL5.A 187.1,62.55 R14.1
N$143  (via drill 0.5)
  other vias: 169.54,56.52 168.28,56.52 167,56.52 165.74,56.52 165.74,55.24 167,55.24 168.28,55.24 169.54,55.24 169.54,48.26 168.28,48.26 167,48.26 165.74,48.26 165.74,49.53 167,49.53 168.28,49.53 169.54,49.53 169.54,50.8 168.28,50.8 167,50.8 165.74,50.8 165.74,52.07 167,52.07 168.28,52.07 169.54,52.07
  pour Top (isolate 0.254, rank 2, no thermals): 161.61,64.14 173.67,64.14 173.67,41.91 161.61,41.91
  pour Bottom (isolate 0.406, rank 2): 161.61,58.42 161.61,45.72 173.67,45.72 173.67,58.42
  pour Bottom (isolate 0.406, no thermals): 172.09,58.42 170.71,63.1 arc74 169.75,63.82 169.07,63.82 arc77 168.09,63.05 167,58.42
N$144
  Top 0.203: RG7.2 Q7.1
  Top 0.305: RG7.2 163.19,45.6 U$8.1
N$145
  Top 0.203: ROUTL6.A 174.4,62.55 R15.1
N$146  (via drill 0.5)
  other vias: 156.84,56.52 155.57,56.52 154.31,56.52 153.03,56.52 153.03,55.24 154.31,55.24 155.57,55.24 156.84,55.24 156.84,48.26 155.57,48.26 154.31,48.26 153.03,48.26 153.03,49.53 154.31,49.53 155.57,49.53 156.84,49.53 156.84,50.8 155.57,50.8 154.31,50.8 153.03,50.8 153.03,52.07 154.31,52.07 155.57,52.07 156.84,52.07
  pour Top (isolate 0.254, rank 2, no thermals): 148.91,64.14 160.97,64.14 160.97,41.91 148.91,41.91
  pour Bottom (isolate 0.406, rank 2): 148.91,58.42 148.91,45.72 160.97,45.72 160.97,58.42
  pour Bottom (isolate 0.406, no thermals): 159.38,58.42 158.01,63.1 arc74 157.05,63.82 156.37,63.82 arc77 155.39,63.05 154.31,58.42
N$147
  Top 0.203: RG8.2 Q8.1
  Top 0.305: RG8.2 150.5,45.6 U$9.1
N$148
  Top 0.203: ROUTL7.A 161.7,62.55 R16.1
POWERBUS_A  (via drill 0.6, 1.2)
  other vias: 107.95,66.67 110.49,66.67 113.03,66.67 115.57,66.67 118.11,66.67 120.65,66.67 123.19,66.67 106.68,67.94 109.22,67.94 111.76,67.94 114.3,67.94 116.84,67.94 119.38,67.94 121.92,67.94 125.73,66.67 128.27,66.67 130.81,66.67 133.35,66.67 135.89,66.67 138.43,66.67 140.97,66.67 124.46,67.94 127,67.94 129.54,67.94 132.08,67.94 134.62,67.94 137.16,67.94 139.7,67.94 142.24,67.94 144.78,67.94 147.32,67.94 149.86,67.94 152.4,67.94 154.94,67.94 157.48,67.94 143.51,66.67 146.05,66.67 148.59,66.67 151.13,66.67 153.67,66.67 156.21,66.67 158.75,66.67 160.02,67.94 162.56,67.94 165.1,67.94 167.64,67.94 170.18,67.94 172.72,67.94 175.26,67.94 161.29,66.67 163.83,66.67 166.37,66.67 168.91,66.67 171.45,66.67 173.99,66.67 176.53,66.67 177.8,67.94 180.34,67.94 182.88,67.94 185.42,67.94 187.96,67.94 179.07,66.67 181.61,66.67 184.15,66.67 186.69,66.67 115.57,52.7 115.57,43.81 190.5,43.81 190.5,52.7
  pour Top (isolate 0.254, no thermals): 135.89,64.14 131.22,64.14 arc45 130.52,63.84 128.56,61.89 arc-45 127.86,61.59 127.7,61.59 arc-42 127.03,61.85 124.74,63.88 arc42 124.08,64.14 123.19,64.14 123.19,70.8 135.89,70.8
  pour Top (isolate 0.254, no thermals): 148.59,64.14 143.92,64.14 arc45 143.22,63.84 141.19,61.81 arc-87 139.82,61.77 137.44,63.88 arc42 136.78,64.14 135.89,64.14 135.89,70.8 148.59,70.8
  pour Top (isolate 0.254, no thermals): 161.29,64.14 156.62,64.14 arc45 155.92,63.84 153.96,61.89 arc-45 153.26,61.59 153.1,61.59 arc-42 152.43,61.85 150.14,63.88 arc42 149.48,64.14 148.59,64.14 148.59,70.8 161.29,70.8
  pour Top (isolate 0.254, no thermals): 173.99,64.14 169.32,64.14 arc45 168.62,63.84 166.66,61.89 arc-45 165.96,61.59 165.8,61.59 arc-42 165.13,61.85 162.84,63.88 arc42 162.18,64.14 161.29,64.14 161.29,70.8 173.99,70.8
  pour Top (isolate 0.254, no thermals): 186.69,64.14 182.02,64.14 arc45 181.32,63.84 179.36,61.89 arc-45 178.66,61.59 178.5,61.59 arc-42 177.83,61.85 175.54,63.88 arc42 174.88,64.14 173.99,64.14 173.99,70.8 186.69,70.8
  pour Top (isolate 0.254, rank 3): 102.87,58.42 102.87,38.73 123.19,38.73 123.19,58.42
  pour Top (isolate 0.254, rank 3, no thermals): 102.87,74.3 102.87,55.88 123.19,55.88 123.19,74.3
  pour Top (isolate 0.254, rank 3): 186.69,70.48 186.69,35.56 193.68,35.56 193.68,70.48
  pour Bottom (isolate 0.406, rank 3, no thermals): 105.41,71.12 105.41,56.52 203.2,56.52 203.2,66.12 arc90 198.2,71.12
POWERBUS_B  (via drill 0.6, 1.2)
  other vias: 106.68,1.91 109.22,1.91 111.76,1.91 114.3,1.91 116.84,1.91 119.38,1.91 121.92,1.91 107.95,3.17 110.49,3.17 113.03,3.17 115.57,3.17 118.11,3.17 120.65,3.17 123.19,3.17 124.46,1.91 127,1.91 129.54,1.91 132.08,1.91 134.62,1.91 137.16,1.91 139.7,1.91 125.73,3.17 128.27,3.17 130.81,3.17 133.35,3.17 135.89,3.17 138.43,3.17 140.97,3.17 143.51,3.17 146.05,3.17 148.59,3.17 151.13,3.17 153.67,3.17 156.21,3.17 158.75,3.17 142.24,1.91 144.78,1.91 147.32,1.91 149.86,1.91 152.4,1.91 154.94,1.91 157.48,1.91 161.29,3.17 163.83,3.17 166.37,3.17 168.91,3.17 171.45,3.17 173.99,3.17 176.53,3.17 160.02,1.91 162.56,1.91 165.1,1.91 167.64,1.91 170.18,1.91 172.72,1.91 175.26,1.91 179.07,3.17 181.61,3.17 184.15,3.17 186.69,3.17 177.8,1.91 180.34,1.91 182.88,1.91 185.42,1.91 187.96,1.91 115.57,25.4 115.57,16.51 191.13,16.51 191.13,25.4
  pour Top (no thermals): 123.19,6.03 127.86,6.03 arc45 128.56,6.33 130.52,8.28 arc-45 131.22,8.57 131.38,8.57 arc-42 132.05,8.32 134.34,6.29 arc42 135,6.03 135.89,6.03 135.89,-0.64 123.19,-0.64
  pour Top (no thermals): 135.89,6.03 140.56,6.03 arc45 141.26,6.33 143.22,8.28 arc-45 143.92,8.57 144.08,8.57 arc-42 144.75,8.32 147.04,6.29 arc42 147.7,6.03 148.59,6.03 148.59,-0.64 135.89,-0.64
  pour Top (no thermals): 148.59,6.03 153.26,6.03 arc45 153.96,6.33 155.92,8.28 arc-45 156.62,8.57 156.78,8.57 arc-42 157.45,8.32 159.74,6.29 arc42 160.4,6.03 161.29,6.03 161.29,-0.64 148.59,-0.64
  pour Top (no thermals): 161.29,6.03 165.96,6.03 arc45 166.66,6.33 168.62,8.28 arc-45 169.32,8.57 169.48,8.57 arc-42 170.15,8.32 172.44,6.29 arc42 173.1,6.03 173.99,6.03 173.99,-0.64 161.29,-0.64
  pour Top (no thermals): 173.99,6.03 178.66,6.03 arc45 179.36,6.33 181.32,8.28 arc-45 182.02,8.57 182.18,8.57 arc-42 182.85,8.32 185.14,6.29 arc42 185.8,6.03 187.32,6.03 187.32,-0.64 173.99,-0.64
  pour Top (isolate 0.254, rank 3, no thermals): 102.87,12.7 102.87,-5.71 123.83,-5.71 123.83,12.7
  pour Top (isolate 0.254, rank 3): 102.87,29.84 102.87,11.43 123.83,11.43 123.83,29.84
  pour Top (isolate 0.254, rank 3): 186.69,34.29 186.69,-1.27 193.68,-1.27 193.68,34.29
  pour Bottom (isolate 0.406, rank 3, no thermals): 105.41,11.43 105.41,-3.17 203.2,-3.17 203.2,11.43
Q4  (via drill 0.5)
  other vias: 165.74,14.61 167,14.61 168.28,14.61 169.54,14.61 169.54,13.34 168.28,13.34 167,13.34 165.74,13.34 165.74,21.59 167,21.59 168.28,21.59 169.54,21.59 169.54,20.32 168.28,20.32 167,20.32 165.74,20.32 165.74,19.05 167,19.05 168.28,19.05 169.54,19.05 169.54,17.78 168.28,17.78 167,17.78 165.74,17.78
  pour Top (isolate 0.254, rank 2, no thermals): 161.61,27.94 173.67,27.94 173.67,6.35 161.61,6.35
  pour Bottom (isolate 0.406, rank 2): 161.61,24.13 161.61,11.75 173.67,11.75 173.67,24.13
  pour Bottom (isolate 0.406, no thermals): 163.19,12.06 164.57,7.39 arc74 165.53,6.67 166.21,6.67 arc77 167.19,7.44 168.28,12.06
REGOUT  (4 unrouted)
  pour Top (isolate 0.254): 13.34,23.18 16.83,23.18 20,20 20,19.05 14.61,19.05 13.34,20.32
RG1
  Top 0.203: T17.3 T18.3 141.27,40.66 140.97,40.96 138.66,40.96 RG9.1 RGP9.1
RG2
  Top 0.203: RGP2.1 RG2.1 146.91,27.71 146.05,28.57 143.23,28.57 T4.3 T3.3
RG3
  Top 0.203: T5.3 T6.3 155.93,28.57 158.75,28.57 159.61,27.71 RG3.1 RGP3.1
RG4
  Top 0.203: T7.3 T8.3 168.63,28.57 171.45,28.57 172.31,27.71 RG4.1 RGP4.1
RG5
  Top 0.203: T9.3 T10.3 181.65,28.57 183.51,28.57 184.38,27.71 RG5.1 RGP5.1
RG6
  Top 0.203: T11.3 T12.3 179.65,40.69 179.39,40.96 177.07,40.96 RG6.1 RGP6.1
RG7
  Top 0.203: T13.3 T14.3 166.95,40.69 166.69,40.96 164.38,40.96 RG7.1 RGP7.1
RG8
  Top 0.203: T15.3 T16.3 154.25,40.69 153.99,40.96 151.68,40.96 RG8.1 RGP8.1
RG9
  Top 0.203: T19.3 T20.3 128.85,40.69 128.27,41.27 125.73,41.27 124.87,42.14 RG10.1 RGP10.1
RST  (5 unrouted)
USBIN  (2 unrouted)

## Text on the board
tNames: SHIELD | ATMEGA | FETS | 10/D12 | 09/D8 | 08/D7 | 07/D4 | 06/D11 | 01/D8 | 02/D5 | 03/D6 | 04/D9 | 05/D10
200bmp: /Users/wes/Desktop/carimbos2 pcb.BMP